# Altium PCB charger_pcb.PcbDoc
Units mm, origin at the board's own origin, x right, y up, seen from the top; angles counter-clockwise.
Board outline 29.5 x 35.25 mm, 2 copper layers (Top Layer, Bottom Layer); 20 components, 12 nets, 55 pads, 45 vias.
Unrouted connection lines stored in the file: 6.
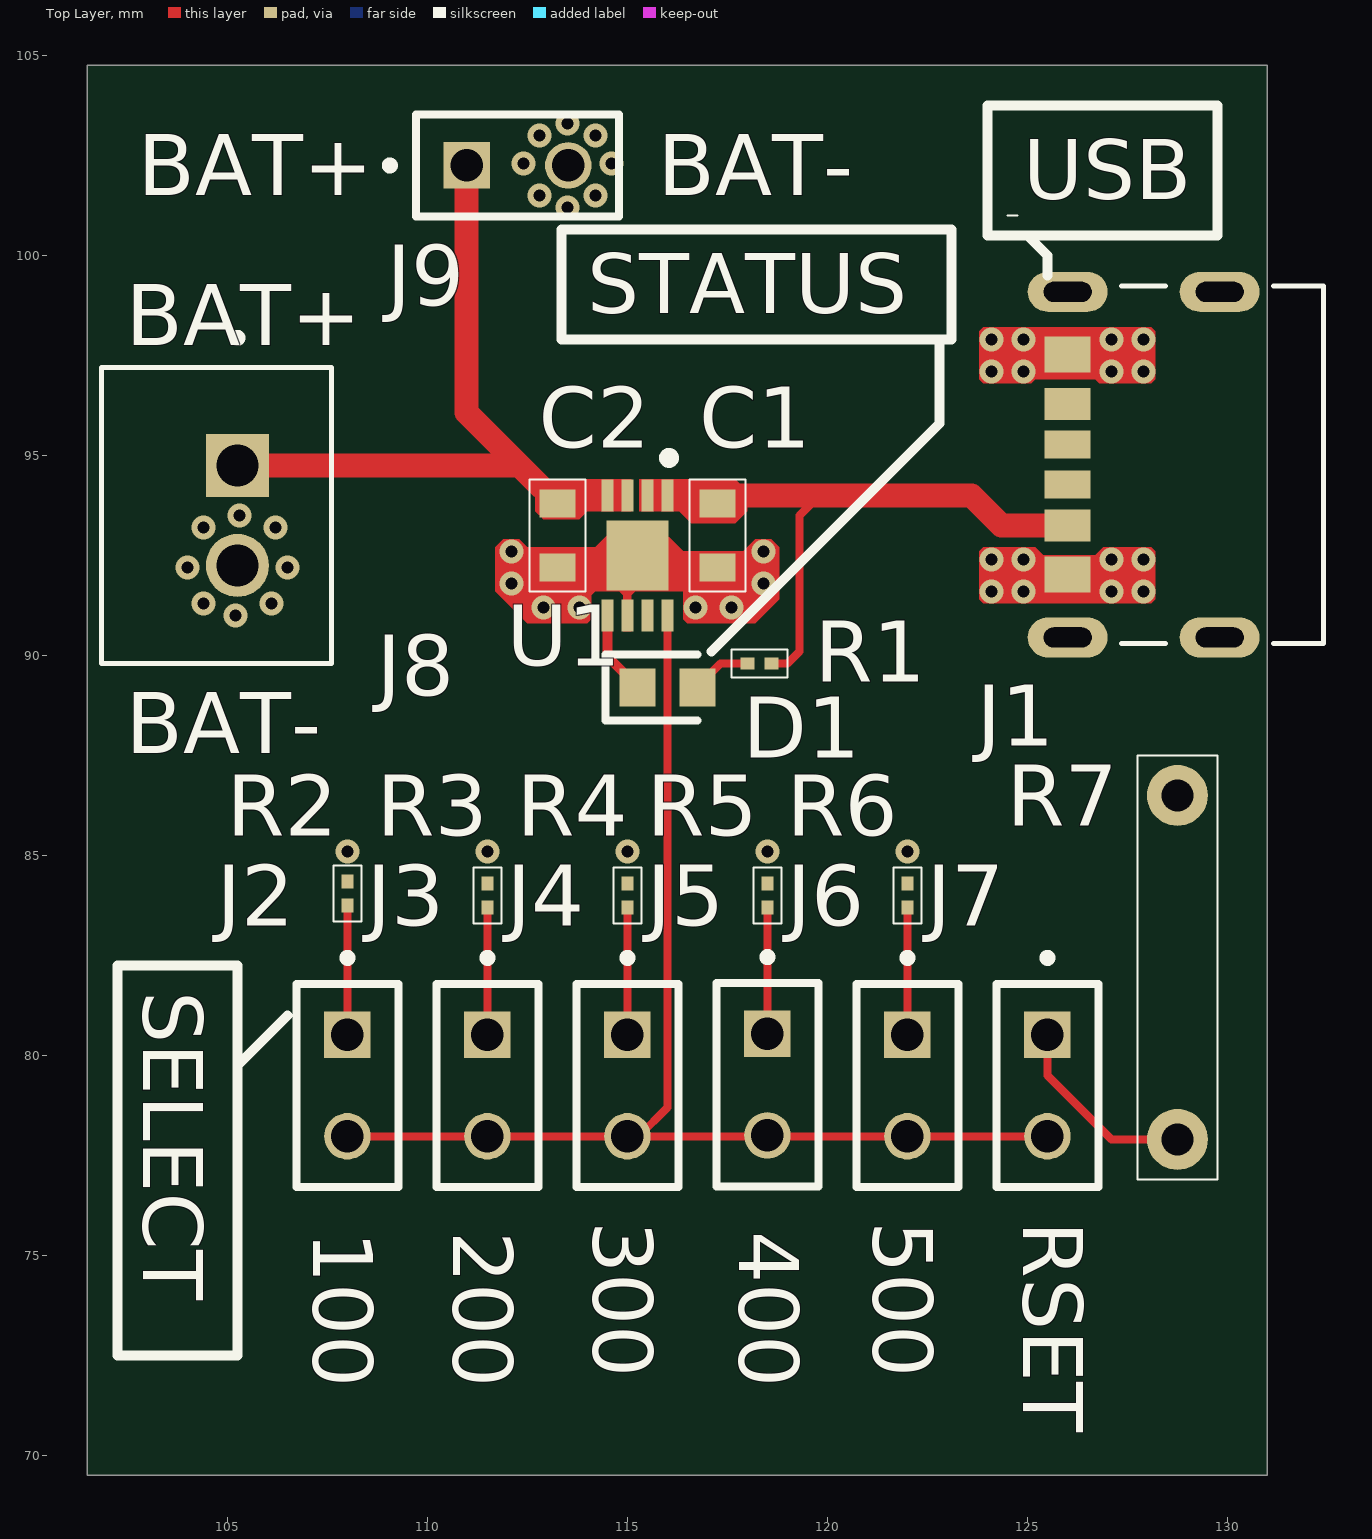
[diagram p0: Top Layer view]
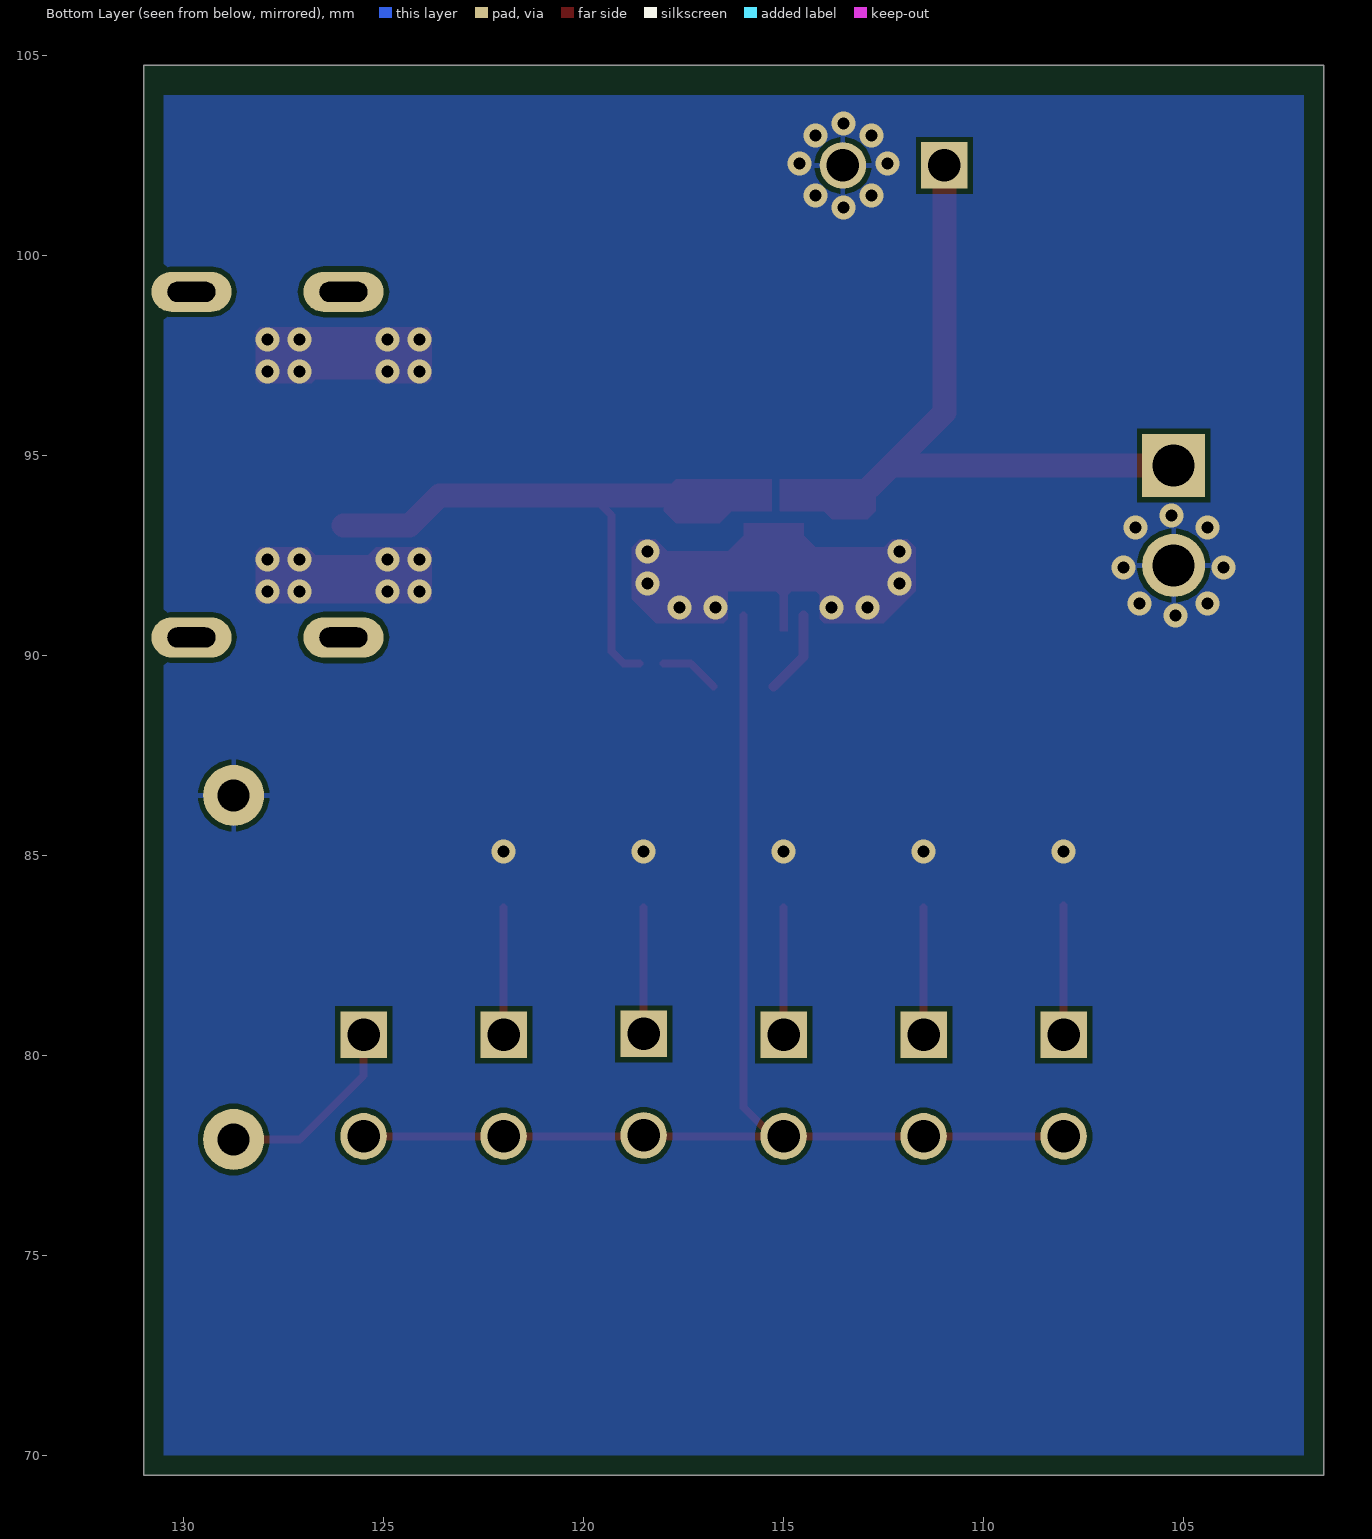
[diagram p1: Bottom Layer view, seen from below]
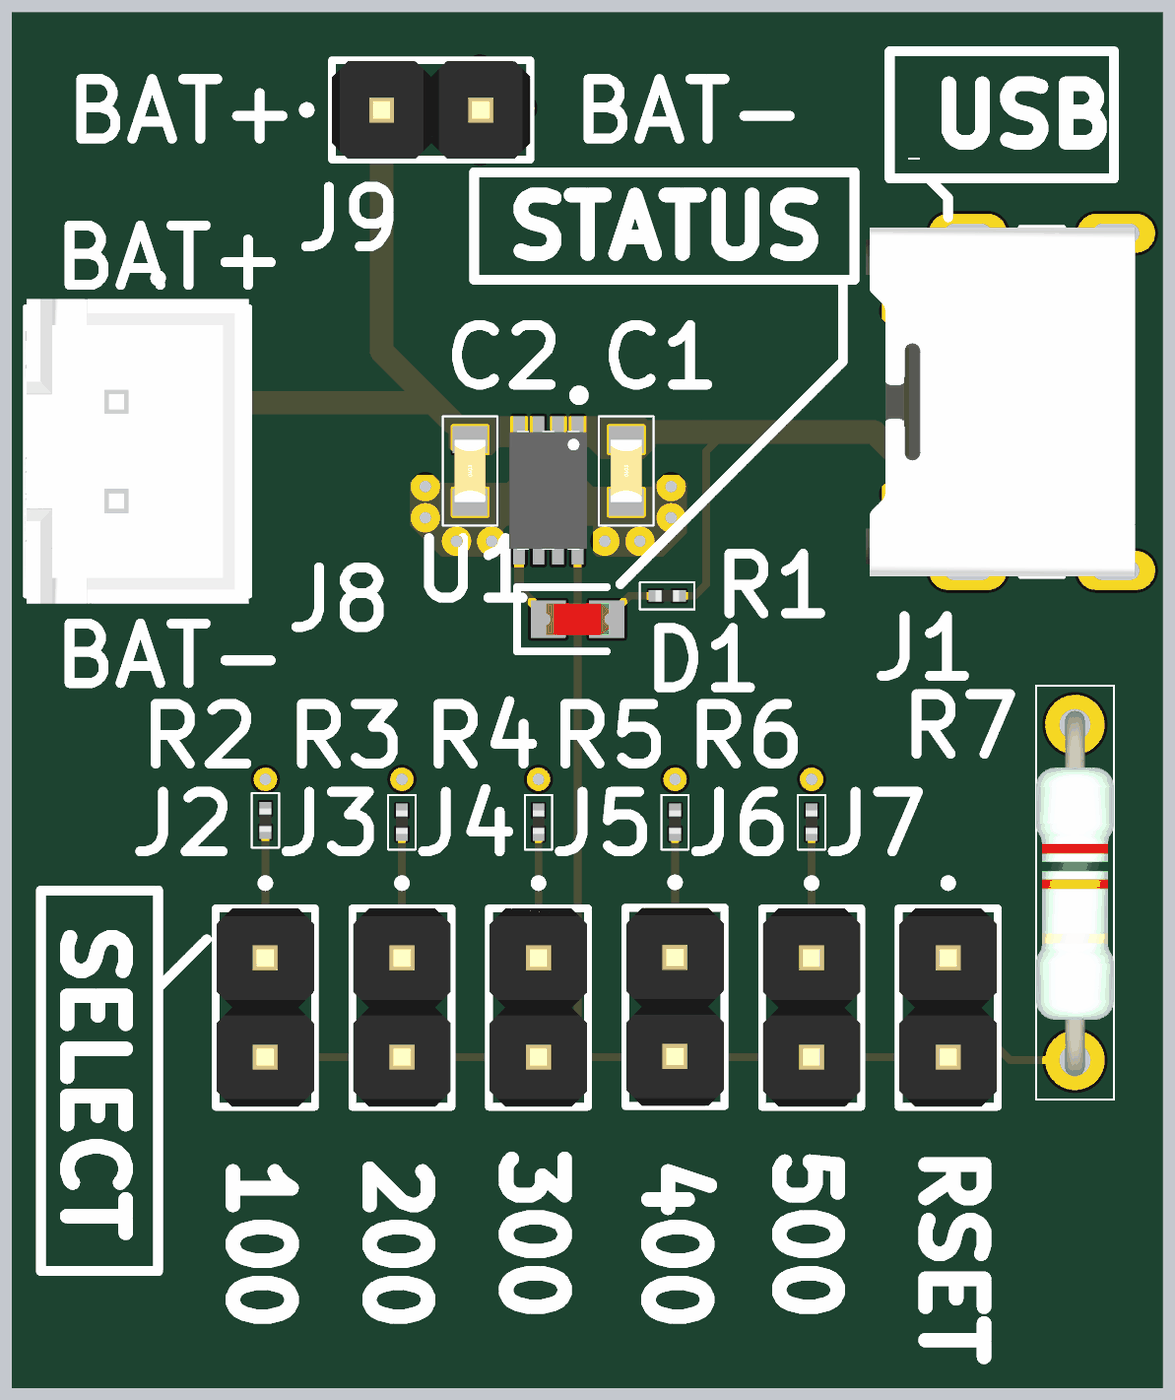
[diagram p2: 3D render of the assembled board from above, using the file's embedded part models]

## Layer stack, top to bottom
Top Solder: solder mask 0.0102, Solder Resist, Dk 3.5
Top Layer: signal copper 0.0356
Dielectric 1: dielectric 0.32, FR-4, Dk 4.8
Bottom Layer: signal copper 0.0356
Bottom Solder: solder mask 0.0102, Solder Resist, Dk 3.5

## Board outline
101.5,104.75 131,104.75 131,69.5 101.5,69.5 101.5,103.457

## Design rules (kind name [scope] priority, off if disabled: settings)
BoardOutlineClearance [All] p1: gap=0.2 ignorepadtopadclearanceinfootprint=FALSE
Clearance [All] p1: gap=0.127 ignorepadtopadclearanceinfootprint=FALSE except(0.25: Arc-Hole Track-Hole SMDPad-Hole THPad-Hole Via-Hole Fill-Hole Poly-Hole Region-Hole Text-Hole)
ComponentClearance [All] p1: gap=0.127 collisioncheckmode=3 verticalgap=0.127 showdistances=TRUE
DiffPairsRouting [All] p1: maxlimit=0.254 minlimit=0.127 mostfreqgap=0.127 toplayer_minwidth=0.127 toplayer_maxwidth=25.4 toplayer_prefwidth=0.127 bottomlayer_minwidth=0.127 bottomlayer_maxwidth=25.4 bottomlayer_prefwidth=0.127 maxuncoupledlength=12.7
Height [All] p1: minheight=0 maxheight=1816.048 prefheight=12.7
HoleSize [All] p1: absolutevalues=TRUE maxlimit=6.3 minlimit=0.3 maxpercent=80.000 minpercent=20.000
HoleToHoleClearance [All] p1: gap=0.25 allowstackedmicrovias=FALSE
MinimumAnnularRing [All] p1: minimumring=0.076
MinimumSolderMaskSliver [All] p1: minsoldermaskwidth=0
PlaneClearance [All] p1: clearance=0.127
PlaneConnect PlaneConnectPowerPads [InPadClass('PowerPads')] p1: planeconnectstyle=Direct reliefexpansion=0.508 reliefentries=4 reliefconductorwidth=0.254 reliefairgap=0.254
PlaneConnect [All] p2: pad.planeconnectstyle=Relief pad.reliefexpansion=0.3 pad.reliefentries=4 pad.reliefconductorwidth=0.127 pad.reliefairgap=0.127 via.planeconnectstyle=Direct via.reliefexpansion=0.3 via.reliefentries=4 via.reliefconductorwidth=0.127 via.reliefairgap=0.127
PolygonConnect PolygonConnectPowerPads [All vs (InPadClass('PowerPads'))] p1: connectstyle=Direct reliefconductorwidth=0.254 reliefentries=4 polygonreliefangle="90 Angle" airgapwidth=0.254
PolygonConnect [All] p2: thpad.connectstyle=Relief thpad.reliefconductorwidth=0.127 thpad.reliefentries=4 thpad.polygonreliefangle="90 Angle" thpad.airgapwidth=0.127 smdpad.connectstyle=Relief smdpad.reliefconductorwidth=0.127 smdpad.reliefentries=4 smdpad.polygonreliefangle="90 Angle" smdpad.airgapwidth=0.127 via.connectstyle=Direct via.reliefconductorwidth=0.127 via.reliefentries=4 via.polygonreliefangle="90 Angle" via.airgapwidth=0.127
RoutingVias [All] p1: holewidth=0.3 width=0.6 viastyle="Through Hole" minholewidth=0.3 minwidth=0.6 maxholewidth=0.6 maxwidth=6.6
SilkToSilkClearance [All] p1: silktosilkclearance=0
SilkToSolderMaskClearance [IsPad] p1: minsilkscreentomaskgap=0.127 clearancetoexposedcopper=TRUE
SolderMaskExpansion [All] p1: expansion=0.075 istentingtop=FALSE
SupplyNets "Schematic Supply Nets" [InNet('GND')] p1: voltage=0.000
Width [All] p1: maxlimit=25.4 minlimit=0.127 preferedwidth=0.127 minimp=50.000000 maximp=50.000000 favimp=50.000000
20 further rules are at their usual default settings.

## Components (designator, comment, footprint, x,y, rotation, side; value= is the part's Value field where it differs from the comment)
C1 "CAP_0603" CAP_0603 117.25,93 r90 top value=4.7u
C2 "CAP_0603" CAP_0603 113.25,93 r90 top value=4.7u
D1 "KT-0603R" LEDC1608X70N 116,89.2 r0 top
J1 "UJC-HP-3-SMT-TR" CUI_UJC-HP-3-SMT-TR 126.005,94.77 r90 top
J2 "TS-102-G-A-1" SAMTEC_TS-102-G-A-1 108,79.25 r270 top
J3 "TS-102-G-A-1" SAMTEC_TS-102-G-A-1 111.5,79.25 r270 top
J4 "TS-102-G-A-1" SAMTEC_TS-102-G-A-1 115,79.25 r270 top
J5 "TS-102-G-A-1" SAMTEC_TS-102-G-A-1 118.5,79.27 r270 top
J6 "TS-102-G-A-1" SAMTEC_TS-102-G-A-1 122,79.25 r270 top
J7 "TS-102-G-A-1" SAMTEC_TS-102-G-A-1 125.5,79.25 r270 top
J8 "B2B-XH-A" JST_B2B-XH-A 104.725,93.5 r90 top
J9 "TS-102-G-A-1" SAMTEC_TS-102-G-A-1 112.25,102.25 r0 top
R1 "RES_0201" RES_0201 118.3,89.8 r0 top value=470
R2 "RES_0201" RES_0201 108,84.05 r90 top value=2k
R3 "RES_0201" RES_0201 111.5,84 r90 top value=2.7k
R4 "RES_0201" RES_0201 115,84 r90 top value=3.3k
R5 "RES_0201" RES_0201 118.5,84 r90 top value=5.1k
R6 "RES_0201" RES_0201 122,84 r90 top value=10k
R7 "" PCBComponent_1 128.75,82.2 r270 top
U1 "MCP73831-2ACI_MC" SON50P300X200X100-9N-D 115.25,92.5 r270 top

## Footprints (in the part's own frame and the unit in brackets; to place one, negate y for a bottom-side part, rotate by r counter-clockwise, add the part's x,y. Pads: shape width x height; smd on the part's side, far side on the other; paste and mask are expansions set on the pad)
CAP_0603 [mm]
  rect 0.7x0.9 smd mask+0.05: 1(-0.8,0) 2(0.8,0)
  silkscreen extent -1.4,-0.7 1.4,0.7, body extent -0.8,-0.4 0.8,0.4, height 0.9
CUI_UJC-HP-3-SMT-TR [mm]
  rect 0.7x1.15 smd: A5(-0.5,0.005) B5(0.5,0.005)
  rect 0.8x1.15 smd: A9(1.52,0.005) B9(-1.52,0.005)
  rect 0.9x1.15 smd: A12(2.75,0.005) B12(-2.75,0.005)
  oval 1x2 hole 0.5 slot 1.2 at 90 deg: S1(-4.32,0) S2(4.32,0) S3(-4.32,-3.8) S4(4.32,-3.8)
  silkscreen extent -4.47,-6.4 4.47,-1.35, body extent -4.47,-4.28 4.47,2.62, height 1.93
JST_B2B-XH-A [mm]
  rect 1.575x1.575 / inner round 1.575 / far side rect 1.575x1.575 hole 1.05: 1(1.25,-0.525)
  round 1.575 hole 1.05: 2(-1.25,-0.525)
  silkscreen extent -3.7,-2.88 4.54,2.88, body extent -3.9,-2.85 3.9,2.88, height 7
LEDC1608X70N [mm]
  rect 0.9x0.95 smd: 1(-0.75,0) 2(0.75,0)
  silkscreen extent -1.55,-0.82 0.75,0.82, body extent -0.8,-0.4 0.8,0.4, height 0.53
PCBComponent_1 [mm]
  round 1.524 hole 0.8: 1(4.3,0) 2(-4.3,0)
  silkscreen extent -5.3,-1 5.3,1, body extent -4.65,-1 4.71,1, height 1.99
RES_0201 [mm]
  rect 0.35x0.3 smd mask+0.05: 1(-0.3,0) 2(0.3,0)
  silkscreen extent -0.7,-0.35 0.7,0.35, body extent -0.3,-0.15 0.3,0.15, height 0.23
SAMTEC_TS-102-G-A-1 [mil]
  rect 45.78x45.78 / inner round 45.78 / far side rect 45.78x45.78 hole 32: 01(-50,0)
  round 45.78 hole 32: 02(50,0)
  silkscreen extent -130,-50 100,50, body extent -100,-49 100,49, height 415
SON50P300X200X100-9N-D [mm]
  rect 0.8x0.3 smd: 1(-1.5,0.75) 2(-1.5,0.25) 3(-1.5,-0.25) 4(-1.5,-0.75) 5(1.5,-0.75) 6(1.5,-0.25) 7(1.5,0.25) 8(1.5,0.75)
  rect 1.75x1.55 smd: 9(0,0)
  silkscreen extent -2.56,0.66 -2.31,0.91, body extent -1.53,-1 1.53,1, height 1

## Part data
D1: "Red 615~630nm 1.9~2.2V 0603 Light Emitting Diodes (LED) RoHS", Manufacturer_Name="Hubei KENTO Elec", Datasheet Link=https://datasheet.lcsc.com/szlcsc/Hubei-KENTO-Elec-KT-0603R_C2286.pdf, Geometry.Height=0.7mm, Manufacturer_Part_Number=KT-0603R
J1 J2 J3 J4 J5 J6 J7 J8 J9: Package=None, Availability=Unavailable, Price=None
  J1: MP=UJC-HP-3-SMT-TR
  J2 J3 J4 J5 J6 J7 J9: MF="{'manufacturer': u'Samtec Inc.'}", MP=TS-102-G-A-1
  J8: MF="{'manufacturer': u'JST Sales America Inc.'}", MP=B2B-XH-A
R7: library part R_THT
U1: "Microchip MCP73831-2ACI/MC, Battery Charge Controller Lithium-Ion, Lithium-Polymer, 8-pin DFN", Arrow Part Number=MCP73831-2ACI/MC, Manufacturer_Name=Microchip, Mouser Part Number=579-MCP73831-2ACI/MC, Arrow Price/Stock=https://www.arrow.com/en/products/mcp73831-2acimc/microchip-technology?region=nac, Datasheet Link=https://datasheet.datasheetarchive.com/originals/distributors/SFDatasheet-4/sf-00090108.pdf, Geometry.Height=1mm, Manufacturer_Part_Number=MCP73831-2ACI/MC, Mouser Price/Stock=https://www.mouser.co.uk/ProductDetail/Microchip-Technology/MCP73831-2ACI-MC?qs=hH%252BOa0VZEiBneYTVdpuVdg%3D%3D

## Via types
v1: diameter 0.6, hole 0.3, Top Layer to Bottom Layer, 45 vias

## Nets (pads, with @x,y where several pads share a name; then routed paths per layer and width w, separated by ;. In a path a pad name is that pad's centre, name@x,y a point inside that pad or via, vN(x,y) a via of type N, cw(c..) or ccw(c..) an arc to the next point about the centre after c; other vN are vias at no path point)
GND: C1.1 C2.1 J1.A12 J1.B12 J8.2 J9.02 R2.2 R3.2 R4.2 R5.2 R6.2 R7.2 U1.6 U1.9
  other v1: 108,85.1 111.5,85.1 115,85.1 118.5,85.1 122,85.1 105.2,91 112.9,91.2 113.8,91.2 116.7,91.2 117.6,91.2 104.4,91.3 106.1,91.3 124.1,91.6 124.9,91.6 127.1,91.6 127.9,91.6 112.1,91.8 118.4,91.8 104,92.2 106.5,92.2 124.1,92.4 124.9,92.4 127.1,92.4 127.9,92.4 112.1,92.6 118.4,92.6 104.4,93.2 106.2,93.2 105.3,93.5 124.1,97.1 124.9,97.1 127.1,97.1 127.9,97.1 124.1,97.9 124.9,97.9 127.1,97.9 127.9,97.9 113.5,101.2 112.8,101.5 114.2,101.5 112.4,102.3 114.6,102.3 112.8,103 114.2,103 113.5,103.3
NetD1_2: D1.2 R1.1 | length 1.5
  Top Layer w0.127: D1.2 D1.2@116.75,89.225
  Top Layer w0.2: D1.2@116.75,89.225 117.325,89.8 R1.1
NetJ2_01: J2.01 R2.1 | length 3.2
  Top Layer w0.2: J2.01 R2.1
NetJ3_01: J3.01 R3.1 | length 3.2
  Top Layer w0.2: J3.01 R3.1
NetJ4_01: J4.01 R4.1 | length 3.2
  Top Layer w0.2: J4.01 R4.1
NetJ5_01: J5.01 R5.1 | length 3.2
  Top Layer w0.2: J5.01 R5.1
NetJ6_01: J6.01 R6.1 | length 3.2
  Top Layer w0.2: J6.01 R6.1
NetJ7_01: J7.01 R7.1 | length 4.9
  Top Layer w0.2: J7.01 125.5,79.5 127.1,77.9 R7.1
PROG: J2.02 J3.02 J4.02 J5.02 J6.02 J7.02 U1.8 | length 31.1
  Top Layer w0.127: J4.02 J4.02@115.28,77.98
  Top Layer w0.2: J2.02 J3.02 J4.02 J6.02 J7.02 ; J4.02@115.28,77.98 116,78.7 U1.8
STAT: D1.1 U1.5 | length 2.1
  Top Layer w0.127: D1.1 D1.1@115.25,89.225
  Top Layer w0.25: U1.5 114.5,89.975 D1.1@115.25,89.225
VBAT: C2.2 J8.1 J9.01 U1.3 U1.4 | length 16.5
  Top Layer w0.2: 112.825,94.225 112.825,94.125 113.15,93.8 C2.2
  Top Layer w0.6: J8.1 112.3,94.75 ; J9.01 110.98,96.07 112.3,94.75 ; 112.825,94.225 112.3,94.75
VUSB: C1.2 J1.A9 J1.B9 R1.2 U1.1 U1.2 | length 14.1
  Top Layer w0.127: C1.2 C1.2@117.45,94
  Top Layer w0.2: R1.2 119,89.8 119.3,90.1 119.3,93.5 119.8,94
  Top Layer w0.6: C1.2@117.45,94 119.8,94 123.6,94 124.35,93.25 J1.B9
pads on no net: J1.A5 J1.B5 J1.S1 J1.S2 J1.S3 J1.S4 U1.7

## Polygon pours and split planes (outlines as drawn)
GND on Bottom Layer "GND_PLANE" (solid, pour order 0): 130.5,104 102,104 102,70 130.5,70

## Other copper
Top Layer:
  region net GND: 126.7,92.5 126.9,92.7 128.1,92.7 128.2,92.6 128.2,91.4 128.1,91.3 123.9,91.3 123.9,91.4 123.9,91.3 123.8,91.4 123.8,92.6 123.9,92.7 125.2,92.7 125.4,92.5 126.4,92.5
  region net GND: 125.2,96.9 125.1,96.8 123.9,96.8 123.8,96.9 123.8,98.1 123.9,98.2 128.1,98.2 128.2,98.1 128.2,97 128.2,96.9 128.1,96.8 126.8,96.8 126.7,96.9
  region net GND: 112.5,92.7 112.3,92.9 111.9,92.9 111.7,92.7 111.7,91.6 112.5,90.8 114,90.8 114.1,90.9 114.1,91.5 114.2,91.6 113.1,92.7
  region net GND: 117.9,92.6 118.2,92.9 118.6,92.9 118.8,92.7 118.8,91.4 118.2,90.8 116.5,90.8 116.4,90.9 116.4,91.6 116.1,91.6 117.1,92.6
  region net GND: 114.9,90.6 114.9,91.5 114.8,91.6 114.2,91.6 113.9,91.9 112.9,91.9 112.7,92.1 112.7,92.5 112.9,92.7 114.2,92.7 114.5,93 114.5,93.3 116,93.3 116,93 116.4,92.6 117.6,92.6 117.8,92.4 117.8,92 117.6,91.8 116.3,91.8 116.1,91.6 115.2,91.6 115.1,91.5 115.1,90.6
  region net VBAT: 115.1,94.4 113,94.4 112.7,94.1 112.7,93.6 112.9,93.4 113.8,93.4 114,93.6 115.1,93.6
  region net VUSB: 115.3,94.4 117.7,94.4 118,94.1 118,93.6 117.7,93.3 116.6,93.3 116.3,93.6 115.3,93.6

## Silkscreen, mask and mechanical layers (free items; w line width, h text height)
Top Overlay:
  lines w0.05: 105.25,78 105.25,79.75 ; 124.5,101 124.75,101
  lines w0.25: 105.25,79.75 106.5,81 ; 117.1,90.1 120,93 122.8,95.8 122.8,97.85 122.85,97.9 ; 125,100.5 125.5,100 125.5,99.5
  lines w0.254: 102.25,72.5 105.25,72.5 105.25,82.25 102.25,82.25 102.25,72.5 ; 113.35,97.9 123.1,97.9 123.1,100.65 113.35,100.65 113.35,97.9 ; 124,100.5 129.75,100.5 129.75,103.75 124,103.75 124,100.5
  text "BAT+" at 102.754,101.504 h1.52
  text "BAT-" at 115.754,101.504 h1.52
  text "USB" at 124.9,101.4 h1.5
  text "STATUS" at 114,98.55 h1.5
  text "BAT+" at 102.454,97.754 h1.52
  text "BAT-" at 102.454,87.554 h1.52
  text "SELECT" at 102.9,81.6 h1.5 r270
  text "300" at 114.15,75.85 h1.5 r270
  text "500" at 121.15,75.85 h1.5 r270
  text "RSET" at 124.9,75.85 h1.5 r270
  text "100" at 107.15,75.6 h1.5 r270
  text "200" at 110.65,75.6 h1.5 r270
  text "400" at 117.8,75.6 h1.5 r270